# Altium PCB MR26_GSS.PcbDoc
Units mil, origin at the board's own origin, x right, y up, seen from the top; angles counter-clockwise.
Board outline 10600 x 7100 mil, 4 copper layers (Top, Route2, Route15, Bottom); 300 components, 152 nets, 1364 pads, 0 vias.
Unrouted connection lines stored in the file: 936.
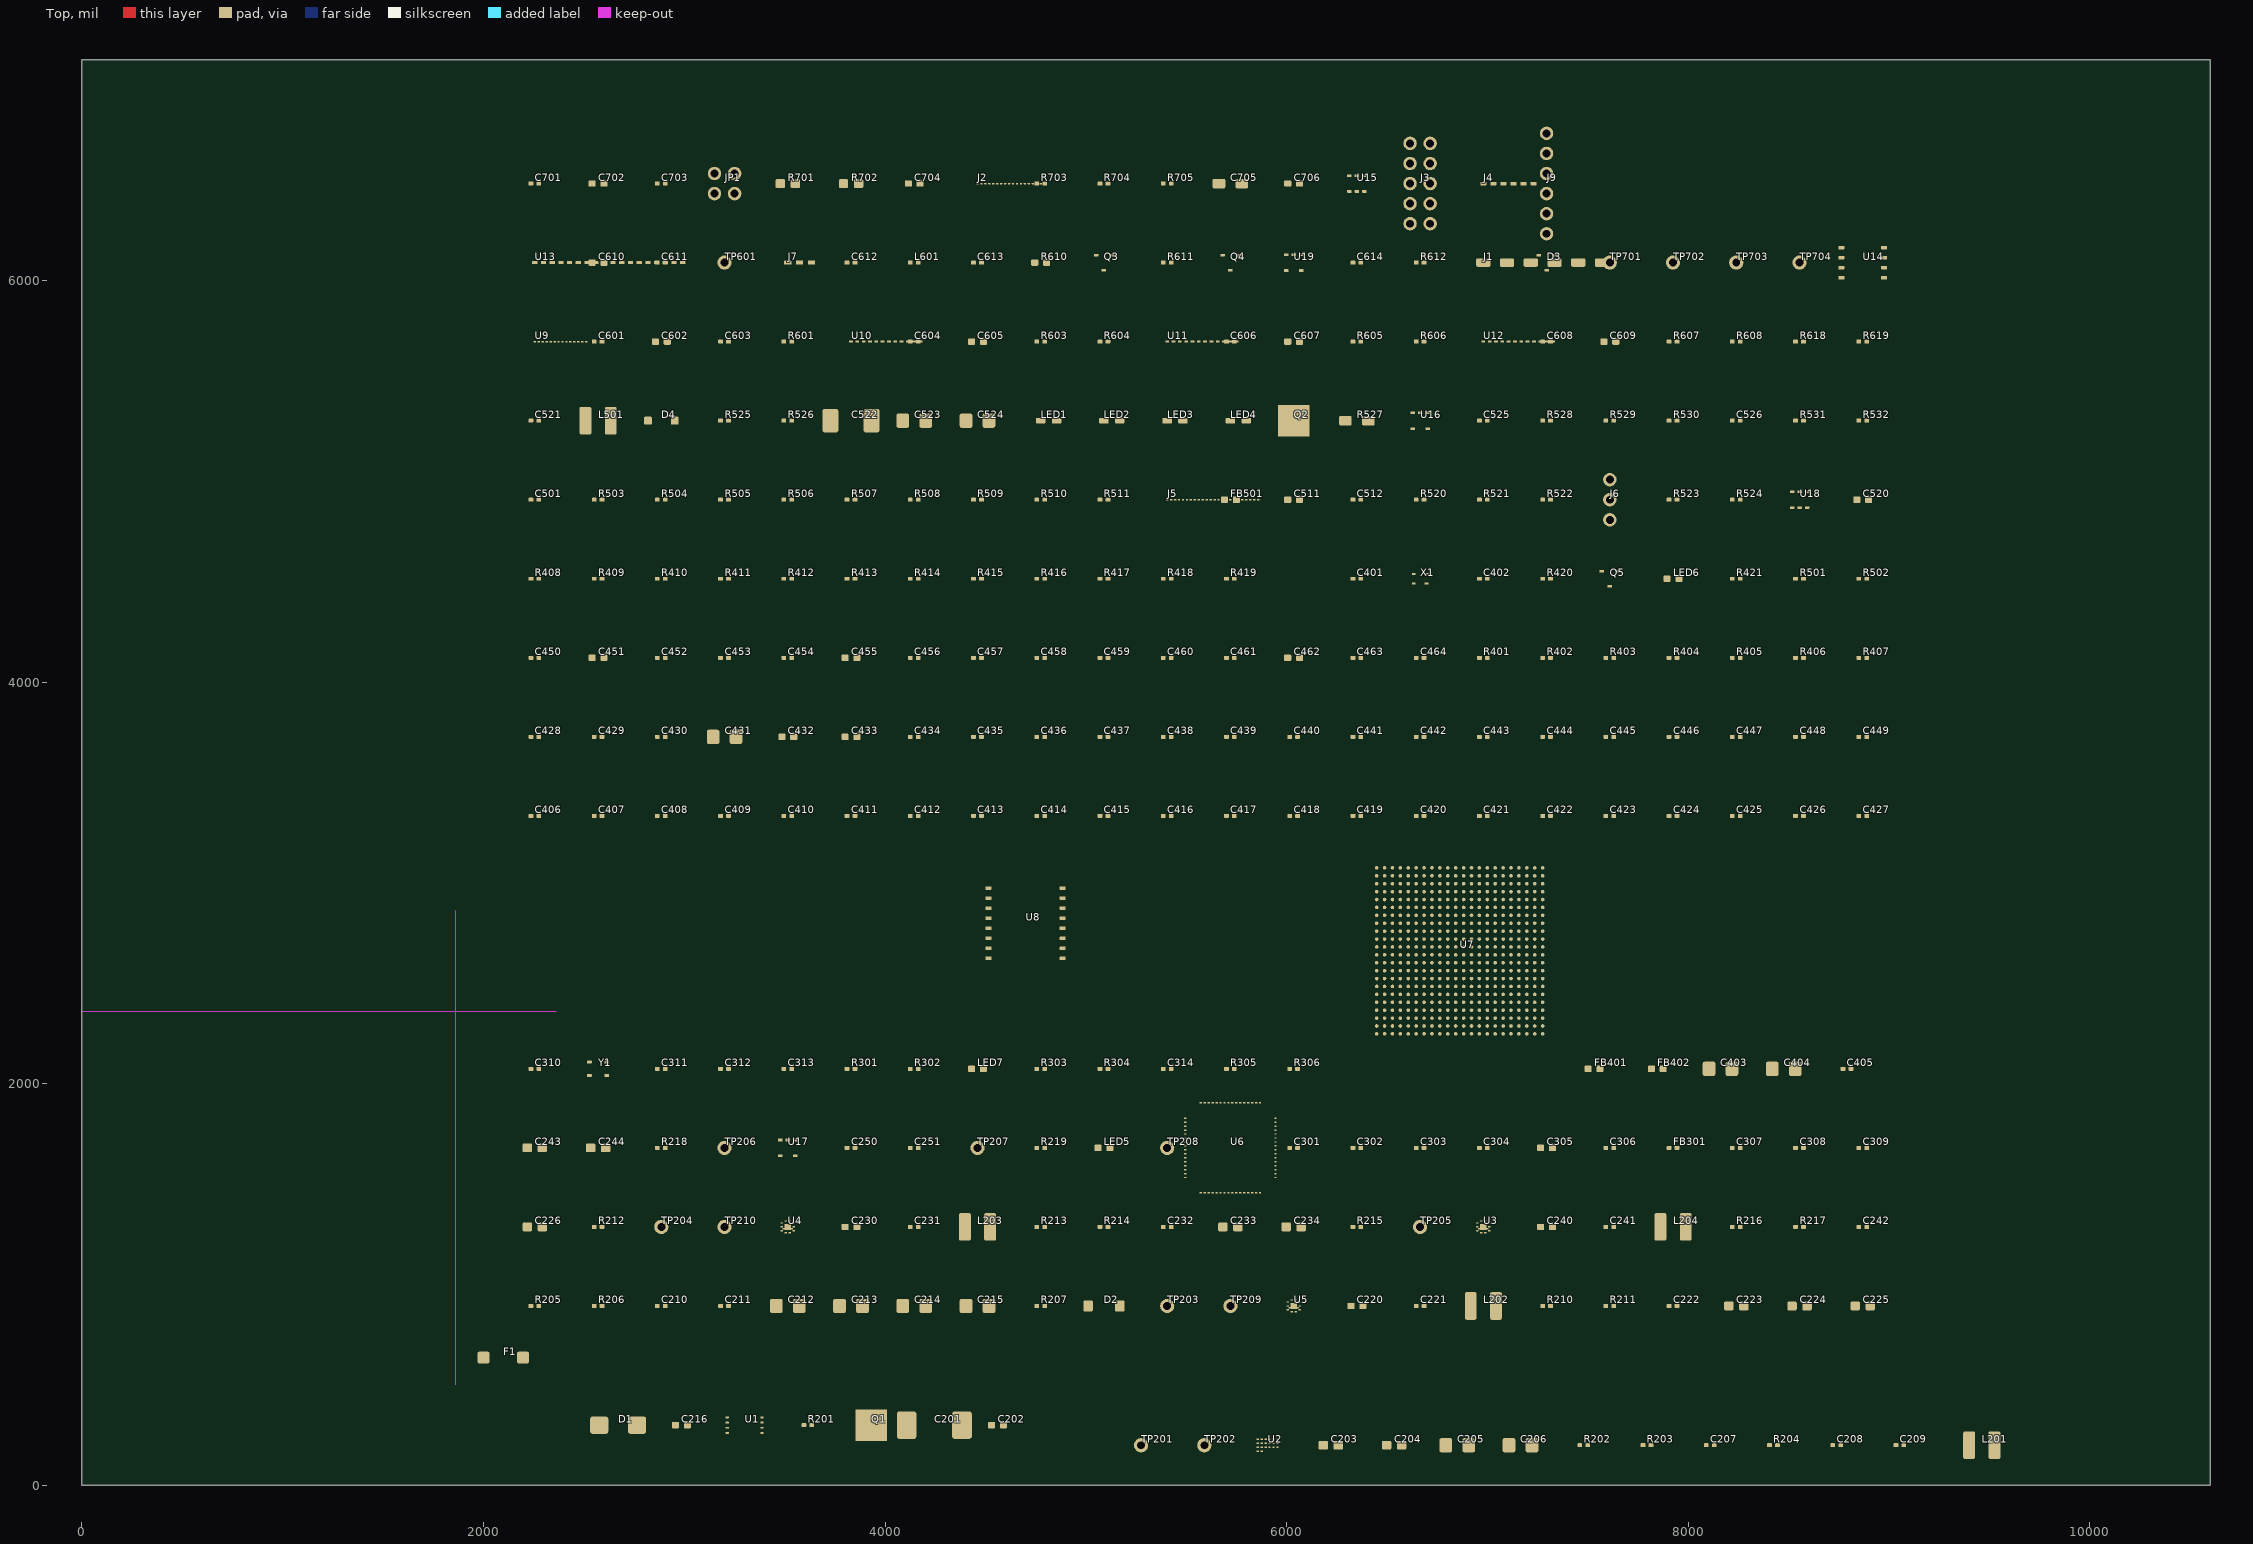
[diagram p0: Top view]
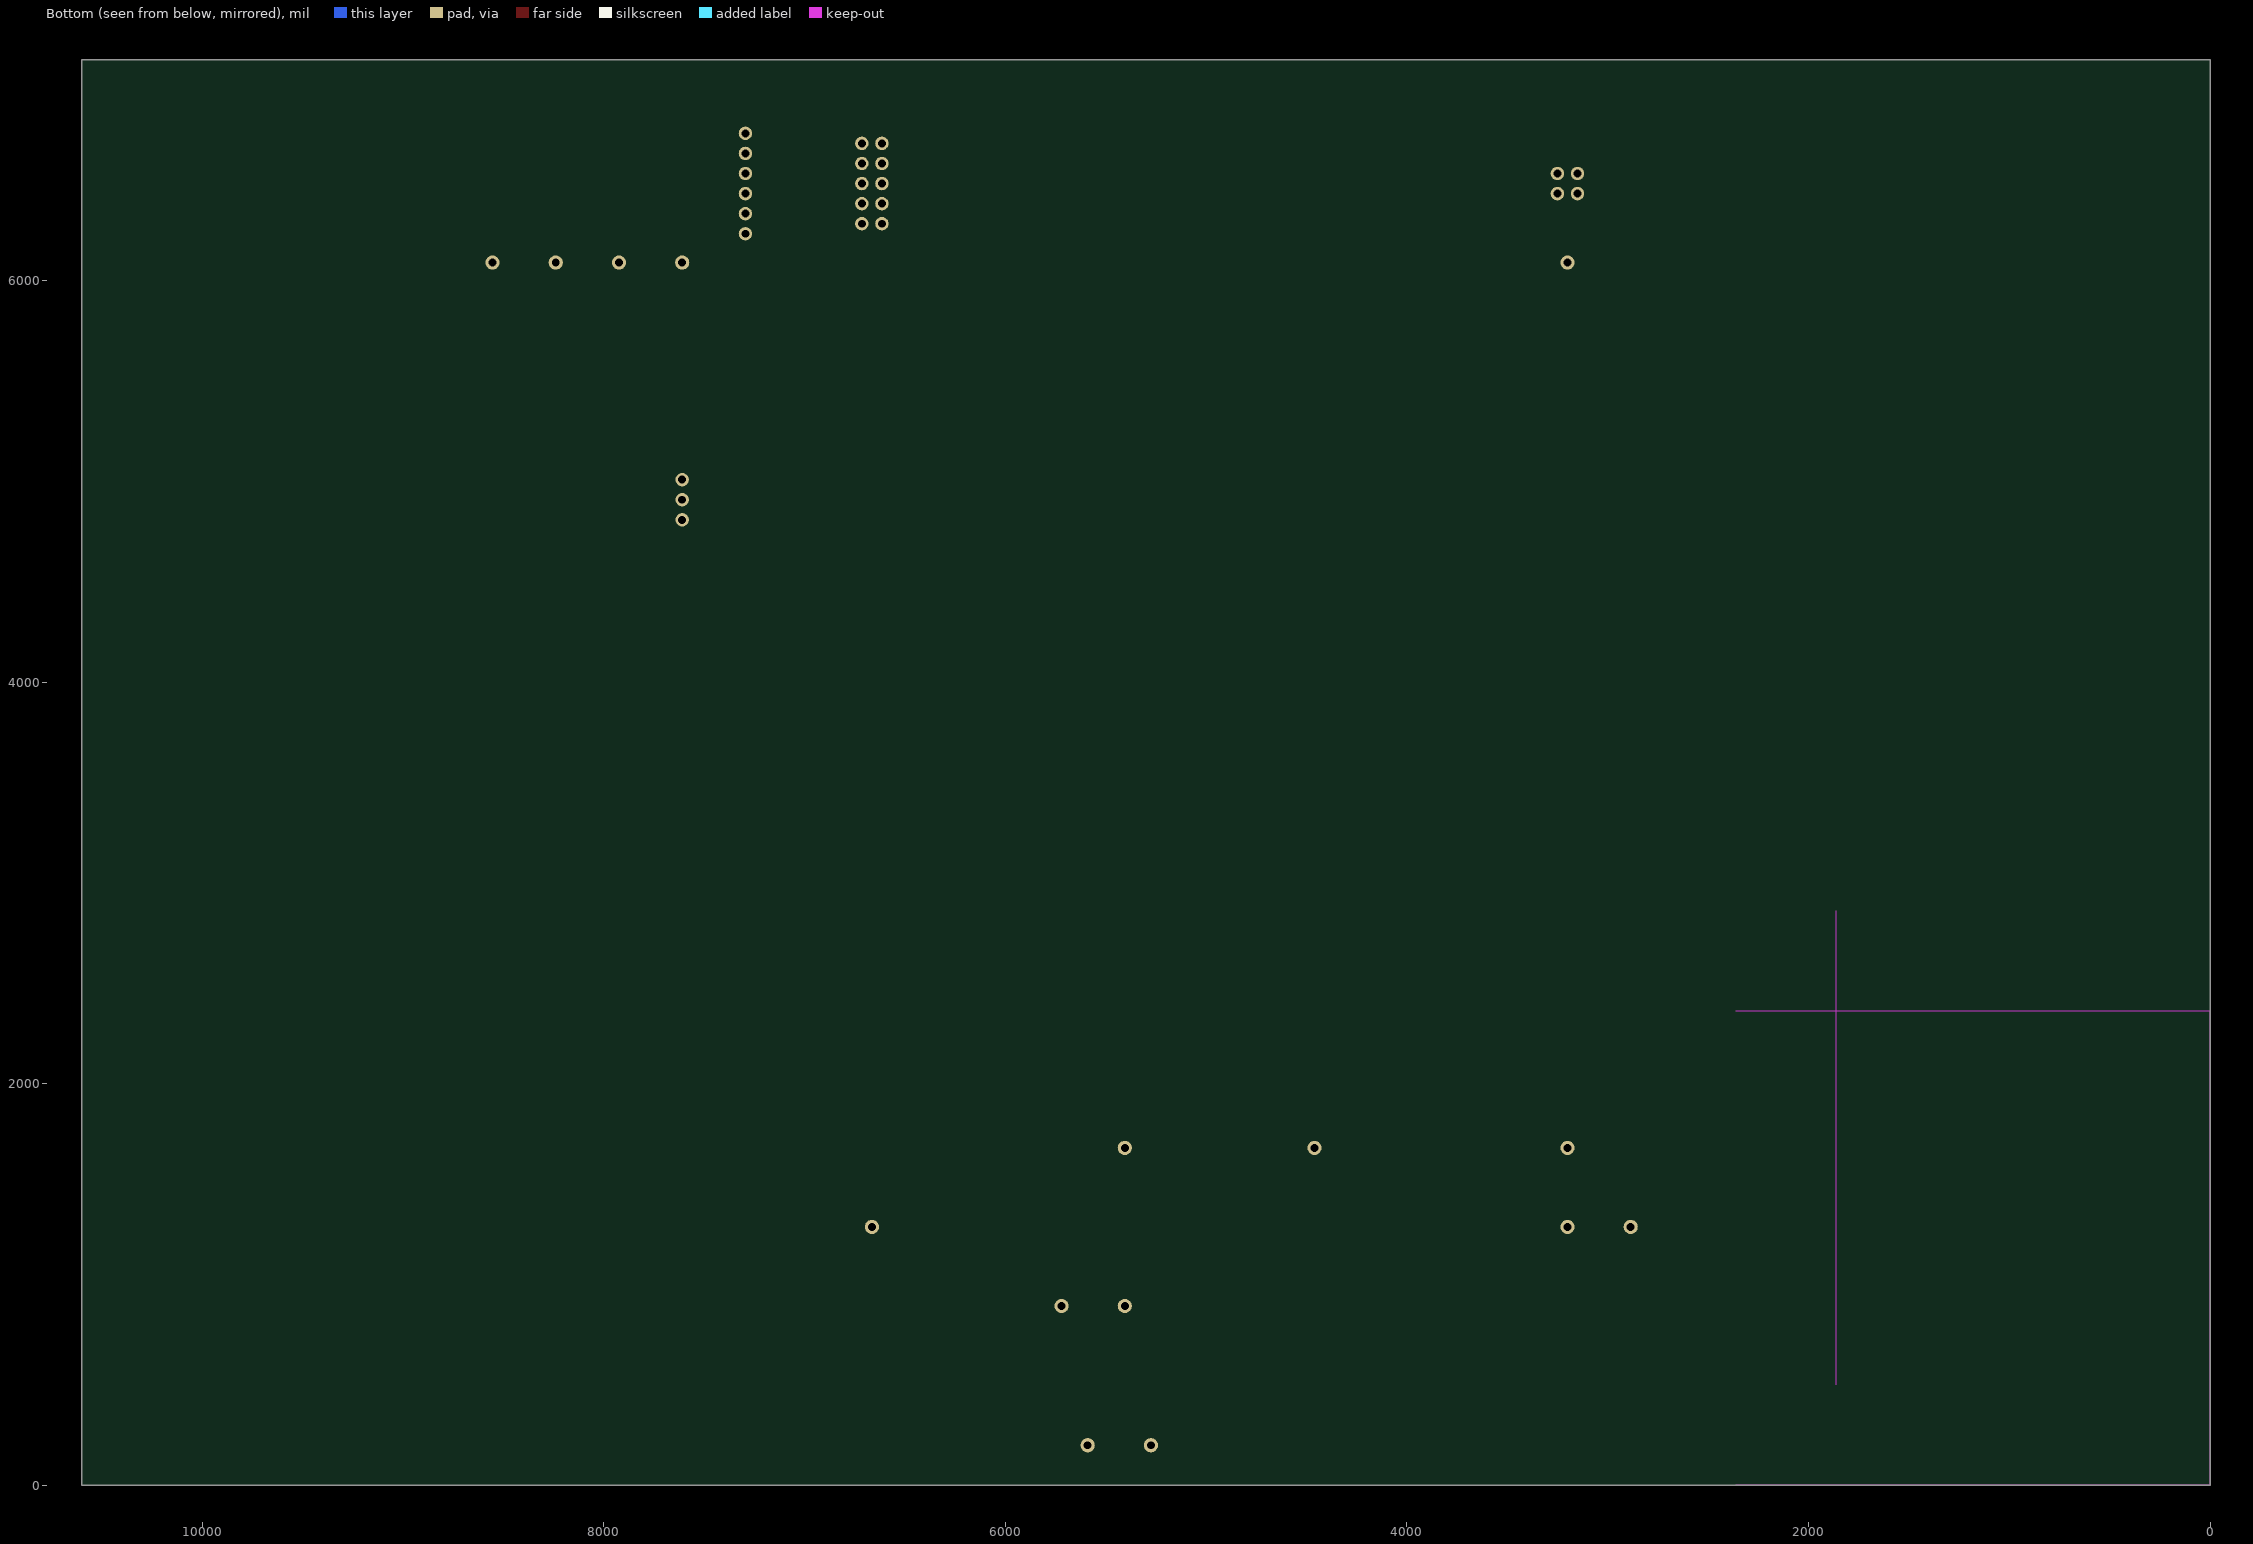
[diagram p1: Bottom view, seen from below]

## Layer stack, top to bottom
Top Solder: solder mask 0.4, Solder Resist, Dk 3.5
Top: signal copper 1.4
Dielectric 1: dielectric 12.6, FR-4, Dk 4.8
Route2: signal copper 1.4
Dielectric 2: dielectric 12.6, FR-4, Dk 4.8
Route15: signal copper 1.4
Dielectric 3: dielectric 12.6, FR-4, Dk 4.8
Bottom: signal copper 1.4
Bottom Solder: solder mask 0.4, Solder Resist, Dk 3.5

## Board outline
0,2362.2 0,0 10600,0 10600,7100 0,7100

## Design rules (kind name [scope] priority, off if disabled: settings)
Clearance "Clearance (Same Net)" [All] p1: gap=10 ignorepadtopadclearanceinfootprint=FALSE
Clearance [All] p2: gap=10 ignorepadtopadclearanceinfootprint=FALSE
MinimumSolderMaskSliver [All] p1 off: minsoldermaskwidth=10
PasteMaskExpansion mlMinCreamFrame [All] p1: expansion=0
PolygonConnect [All] p1: connectstyle=Relief reliefconductorwidth=10 reliefentries=4 polygonreliefangle="90 Angle" airgapwidth=10
RoutingVias [All] p1: holewidth=20 width=60 viastyle="Through Hole" minholewidth=20 minwidth=60 maxholewidth=100 maxwidth=100
SolderMaskExpansion mlMinStopFrame [All] p1: expansion=0 istentingtop=FALSE
Width [All] p1: maxlimit=10 minlimit=10 preferedwidth=10
28 further rules are at their usual default settings.

## Components (designator, comment, footprint, x,y, rotation, side; value= is the part's Value field where it differs from the comment)
C201 "" C_CP_Elec_8x10 4245.67,300 r0 top
C202 "" C_0603 4560.63,300 r0 top
C203 "" C_0805 6220.47,200 r0 top
C204 "" C_0805 6535.43,200 r0 top
C205 "" C_1210 6850.39,200 r0 top
C206 "" C_1210 7165.35,200 r0 top
C207 "" C_0402 8110.24,200 r0 top
C208 "" C_0402 8740.16,200 r0 top
C209 "" C_0402 9055.12,200 r0 top
C210 "" C_0402 2885.83,893.7 r0 top
C211 "" C_0402 3200.79,893.7 r0 top
C212 "" C_1210 3515.75,893.7 r0 top
C213 "" C_1210 3830.71,893.7 r0 top
C214 "" C_1210 4145.67,893.7 r0 top
C215 "" C_1210 4460.63,893.7 r0 top
C216 "" C_0603 2985.83,300 r0 top
C220 "" C_0603 6350.39,893.7 r0 top
C221 "" C_0402 6665.35,893.7 r0 top
C222 "" C_0402 7925.2,893.7 r0 top
C223 "" C_0805 8240.16,893.7 r0 top
C224 "" C_0805 8555.12,893.7 r0 top
C225 "" C_0805 8870.08,893.7 r0 top
C226 "" C_0805 2255.91,1287.4 r0 top
C230 "" C_0603 3830.71,1287.4 r0 top
C231 "" C_0402 4145.67,1287.4 r0 top
C232 "" C_0402 5405.51,1287.4 r0 top
C233 "" C_0805 5720.47,1287.4 r0 top
C234 "" C_0805 6035.43,1287.4 r0 top
C240 "" C_0603 7295.28,1287.4 r0 top
C241 "" C_0402 7610.24,1287.4 r0 top
C242 "" C_0402 8870.08,1287.4 r0 top
C243 "" C_0805 2255.91,1681.1 r0 top
C244 "" C_0805 2570.87,1681.1 r0 top
C250 "" C_0402 3830.71,1681.1 r0 top
C251 "" C_0402 4145.67,1681.1 r0 top
C301 "" C_0402 6035.43,1681.1 r0 top
C302 "" C_0402 6350.39,1681.1 r0 top
C303 "" C_0402 6665.35,1681.1 r0 top
C304 "" C_0402 6980.32,1681.1 r0 top
C305 "" C_0603 7295.28,1681.1 r0 top
C306 "" C_0402 7610.24,1681.1 r0 top
C307 "" C_0402 8240.16,1681.1 r0 top
C308 "" C_0402 8555.12,1681.1 r0 top
C309 "" C_0402 8870.08,1681.1 r0 top
C310 "" C_0402 2255.91,2074.8 r0 top
C311 "" C_0402 2885.83,2074.8 r0 top
C312 "" C_0402 3200.79,2074.8 r0 top
C313 "" C_0402 3515.75,2074.8 r0 top
C314 "" C_0402 5405.51,2074.8 r0 top
C401 "" C_0402 6350.39,4515.75 r0 top
C402 "" C_0402 6980.32,4515.75 r0 top
C403 "" C_1210 8161.42,2074.8 r0 top
C404 "" C_1210 8476.38,2074.8 r0 top
C405 "" C_0402 8791.34,2074.8 r0 top
C406 "" C_0402 2255.91,3334.65 r0 top
C407 "" C_0402 2570.87,3334.65 r0 top
C408 "" C_0402 2885.83,3334.65 r0 top
C409 "" C_0402 3200.79,3334.65 r0 top
C410 "" C_0402 3515.75,3334.65 r0 top
C411 "" C_0402 3830.71,3334.65 r0 top
C412 "" C_0402 4145.67,3334.65 r0 top
C413 "" C_0402 4460.63,3334.65 r0 top
C414 "" C_0402 4775.59,3334.65 r0 top
C415 "" C_0402 5090.55,3334.65 r0 top
C416 "" C_0402 5405.51,3334.65 r0 top
C417 "" C_0402 5720.47,3334.65 r0 top
C418 "" C_0402 6035.43,3334.65 r0 top
C419 "" C_0402 6350.39,3334.65 r0 top
C420 "" C_0402 6665.35,3334.65 r0 top
C421 "" C_0402 6980.32,3334.65 r0 top
C422 "" C_0402 7295.28,3334.65 r0 top
C423 "" C_0402 7610.24,3334.65 r0 top
C424 "" C_0402 7925.2,3334.65 r0 top
C425 "" C_0402 8240.16,3334.65 r0 top
C426 "" C_0402 8555.12,3334.65 r0 top
C427 "" C_0402 8870.08,3334.65 r0 top
C428 "" C_0402 2255.91,3728.35 r0 top
C429 "" C_0402 2570.87,3728.35 r0 top
C430 "" C_0402 2885.83,3728.35 r0 top
C431 "" C_1210 3200.79,3728.35 r0 top
C432 "" C_0603 3515.75,3728.35 r0 top
C433 "" C_0603 3830.71,3728.35 r0 top
C434 "" C_0402 4145.67,3728.35 r0 top
C435 "" C_0402 4460.63,3728.35 r0 top
C436 "" C_0402 4775.59,3728.35 r0 top
C437 "" C_0402 5090.55,3728.35 r0 top
C438 "" C_0402 5405.51,3728.35 r0 top
C439 "" C_0402 5720.47,3728.35 r0 top
C440 "" C_0402 6035.43,3728.35 r0 top
C441 "" C_0402 6350.39,3728.35 r0 top
C442 "" C_0402 6665.35,3728.35 r0 top
C443 "" C_0402 6980.32,3728.35 r0 top
C444 "" C_0402 7295.28,3728.35 r0 top
C445 "" C_0402 7610.24,3728.35 r0 top
C446 "" C_0402 7925.2,3728.35 r0 top
C447 "" C_0402 8240.16,3728.35 r0 top
C448 "" C_0402 8555.12,3728.35 r0 top
C449 "" C_0402 8870.08,3728.35 r0 top
C450 "" C_0402 2255.91,4122.05 r0 top
C451 "" C_0603 2570.87,4122.05 r0 top
C452 "" C_0402 2885.83,4122.05 r0 top
C453 "" C_0402 3200.79,4122.05 r0 top
C454 "" C_0402 3515.75,4122.05 r0 top
C455 "" C_0603 3830.71,4122.05 r0 top
C456 "" C_0402 4145.67,4122.05 r0 top
C457 "" C_0402 4460.63,4122.05 r0 top
C458 "" C_0402 4775.59,4122.05 r0 top
C459 "" C_0402 5090.55,4122.05 r0 top
C460 "" C_0402 5405.51,4122.05 r0 top
C461 "" C_0402 5720.47,4122.05 r0 top
C462 "" C_0603 6035.43,4122.05 r0 top
C463 "" C_0402 6350.39,4122.05 r0 top
C464 "" C_0402 6665.35,4122.05 r0 top
C501 "" C_0402 2255.91,4909.45 r0 top
C511 "" C_0603 6035.43,4909.45 r0 top
C512 "" C_0402 6350.39,4909.45 r0 top
C520 "" C_0603 8870.08,4909.45 r0 top
C521 "" C_0402 2255.91,5303.15 r0 top
C522 "" C_CP_Elec_6.3x7.7 3830.71,5303.15 r0 top
C523 "" C_1210 4145.67,5303.15 r0 top
C524 "" C_1210 4460.63,5303.15 r0 top
C525 "" C_0402 6980.32,5303.15 r0 top
C526 "" C_0402 8240.16,5303.15 r0 top
C601 "" C_0402 2570.87,5696.85 r0 top
C602 "" C_0603 2885.83,5696.85 r0 top
C603 "" C_0402 3200.79,5696.85 r0 top
C604 "" C_0402 4145.67,5696.85 r0 top
C605 "" C_0603 4460.63,5696.85 r0 top
C606 "" C_0402 5720.47,5696.85 r0 top
C607 "" C_0603 6035.43,5696.85 r0 top
C608 "" C_0402 7295.28,5696.85 r0 top
C609 "" C_0603 7610.24,5696.85 r0 top
C610 "" C_0603 2570.87,6090.55 r0 top
C611 "" C_0402 2885.83,6090.55 r0 top
C612 "" C_0402 3830.71,6090.55 r0 top
C613 "" C_0402 4460.63,6090.55 r0 top
C614 "" C_0402 6350.39,6090.55 r0 top
C701 "" C_0402 2255.91,6484.25 r0 top
C702 "" C_0603 2570.87,6484.25 r0 top
C703 "" C_0402 2885.83,6484.25 r0 top
C704 "" C_0603 4145.67,6484.25 r0 top
C705 "" C_1206 5720.47,6484.25 r0 top
C706 "" C_0603 6035.43,6484.25 r0 top
D1 "" D_SMB 2670.87,300 r0 top
D2 "" D_SOD-128 5090.55,893.7 r0 top
D3 "" SOT-23 7295.28,6090.55 r0 top
D4 "" D_SOD-123W 2885.83,5303.15 r0 top
F1 "" Fuse_Nano2_452 2098.43,636.57 r0 top
FB301 "" L_0402 7925.2,1681.1 r0 top
FB401 "" L_0603 7531.5,2074.8 r0 top
FB402 "" L_0603 7846.46,2074.8 r0 top
FB501 "" L_0603 5720.47,4909.45 r0 top
J1 "" Molex_Micro-Fit_43045-0600_2x3_RA 6980.32,6090.55 r0 top
J2 "" USB_C_GCT_USB4105 4460.63,6484.25 r0 top
J3 "" IDC-Header_2x05_P2.54mm 6665.35,6484.25 r0 top
J4 "" TC2030-IDC-NL 6980.32,6484.25 r0 top
J5 "" FH12-22S-0.5SH 5405.51,4909.45 r0 top
J6 "" PinHeader_1x03_P2.54mm 7610.24,4909.45 r0 top
J7 "" U.FL_Hirose 3515.75,6090.55 r0 top
J9 "" PinHeader_1x06_P2.54mm 7295.28,6484.25 r0 top
JP1 "" PinHeader_2x02_P2.54mm 3200.79,6484.25 r0 top
L201 "" L_XEL4030 9462.99,200 r0 top
L202 "" L_4x4 6980.32,893.7 r0 top
L203 "" L_4x4 4460.63,1287.4 r0 top
L204 "" L_4x4 7925.2,1287.4 r0 top
L501 "" L_XEL4030 2570.87,5303.15 r0 top
L601 "" L_0402 4145.67,6090.55 r0 top
LED1 "" OSLON_Black_3.75x3.75 4775.59,5303.15 r0 top
LED2 "" OSLON_Black_3.75x3.75 5090.55,5303.15 r0 top
LED3 "" OSLON_Black_3.75x3.75 5405.51,5303.15 r0 top
LED4 "" OSLON_Black_3.75x3.75 5720.47,5303.15 r0 top
LED5 "" LED_0603 5090.55,1681.1 r0 top
LED6 "" LED_0603 7925.2,4515.75 r0 top
LED7 "" LED_0603 4460.63,2074.8 r0 top
Q1 "" PG-TDSON-8 3930.71,300 r0 top
Q2 "" PG-TSDSON-8 6035.43,5303.15 r0 top
Q3 "" SOT-23 5090.55,6090.55 r0 top
Q4 "" SOT-23 5720.47,6090.55 r0 top
Q5 "" SOT-23 7610.24,4515.75 r0 top
R201 "" R_0402 3615.75,300 r0 top
R202 "" R_0402 7480.32,200 r0 top
R203 "" R_0402 7795.28,200 r0 top
R204 "" R_0402 8425.2,200 r0 top
R205 "" R_0402 2255.91,893.7 r0 top
R206 "" R_0402 2570.87,893.7 r0 top
R207 "" R_0402 4775.59,893.7 r0 top
R210 "" R_0402 7295.28,893.7 r0 top
R211 "" R_0402 7610.24,893.7 r0 top
R212 "" R_0402 2570.87,1287.4 r0 top
R213 "" R_0402 4775.59,1287.4 r0 top
R214 "" R_0402 5090.55,1287.4 r0 top
R215 "" R_0402 6350.39,1287.4 r0 top
R216 "" R_0402 8240.16,1287.4 r0 top
R217 "" R_0402 8555.12,1287.4 r0 top
R218 "" R_0402 2885.83,1681.1 r0 top
R219 "" R_0402 4775.59,1681.1 r0 top
R301 "" R_0402 3830.71,2074.8 r0 top
R302 "" R_0402 4145.67,2074.8 r0 top
R303 "" R_0402 4775.59,2074.8 r0 top
R304 "" R_0402 5090.55,2074.8 r0 top
R305 "" R_0402 5720.47,2074.8 r0 top
R306 "" R_0402 6035.43,2074.8 r0 top
R401 "" R_0402 6980.32,4122.05 r0 top
R402 "" R_0402 7295.28,4122.05 r0 top
R403 "" R_0402 7610.24,4122.05 r0 top
R404 "" R_0402 7925.2,4122.05 r0 top
R405 "" R_0402 8240.16,4122.05 r0 top
R406 "" R_0402 8555.12,4122.05 r0 top
R407 "" R_0402 8870.08,4122.05 r0 top
R408 "" R_0402 2255.91,4515.75 r0 top
R409 "" R_0402 2570.87,4515.75 r0 top
R410 "" R_0402 2885.83,4515.75 r0 top
R411 "" R_0402 3200.79,4515.75 r0 top
R412 "" R_0402 3515.75,4515.75 r0 top
R413 "" R_0402 3830.71,4515.75 r0 top
R414 "" R_0402 4145.67,4515.75 r0 top
R415 "" R_0402 4460.63,4515.75 r0 top
R416 "" R_0402 4775.59,4515.75 r0 top
R417 "" R_0402 5090.55,4515.75 r0 top
R418 "" R_0402 5405.51,4515.75 r0 top
R419 "" R_0402 5720.47,4515.75 r0 top
R420 "" R_0402 7295.28,4515.75 r0 top
R421 "" R_0402 8240.16,4515.75 r0 top
R501 "" R_0402 8555.12,4515.75 r0 top
R502 "" R_0402 8870.08,4515.75 r0 top
R503 "" R_0402 2570.87,4909.45 r0 top
R504 "" R_0402 2885.83,4909.45 r0 top
R505 "" R_0402 3200.79,4909.45 r0 top
R506 "" R_0402 3515.75,4909.45 r0 top
R507 "" R_0402 3830.71,4909.45 r0 top
R508 "" R_0402 4145.67,4909.45 r0 top
R509 "" R_0402 4460.63,4909.45 r0 top
R510 "" R_0402 4775.59,4909.45 r0 top
R511 "" R_0402 5090.55,4909.45 r0 top
R520 "" R_0402 6665.35,4909.45 r0 top
R521 "" R_0402 6980.32,4909.45 r0 top
R522 "" R_0402 7295.28,4909.45 r0 top
R523 "" R_0402 7925.2,4909.45 r0 top
R524 "" R_0402 8240.16,4909.45 r0 top
R525 "" R_0402 3200.79,5303.15 r0 top
R526 "" R_0402 3515.75,5303.15 r0 top
R527 "" R_1206 6350.39,5303.15 r0 top
R528 "" R_0402 7295.28,5303.15 r0 top
R529 "" R_0402 7610.24,5303.15 r0 top
R530 "" R_0402 7925.2,5303.15 r0 top
R531 "" R_0402 8555.12,5303.15 r0 top
R532 "" R_0402 8870.08,5303.15 r0 top
R601 "" R_0402 3515.75,5696.85 r0 top
R603 "" R_0402 4775.59,5696.85 r0 top
R604 "" R_0402 5090.55,5696.85 r0 top
R605 "" R_0402 6350.39,5696.85 r0 top
R606 "" R_0402 6665.35,5696.85 r0 top
R607 "" R_0402 7925.2,5696.85 r0 top
R608 "" R_0402 8240.16,5696.85 r0 top
R610 "" R_0603 4775.59,6090.55 r0 top
R611 "" R_0402 5405.51,6090.55 r0 top
R612 "" R_0402 6665.35,6090.55 r0 top
R618 "" R_0402 8555.12,5696.85 r0 top
R619 "" R_0402 8870.08,5696.85 r0 top
R701 "" R_0805 3515.75,6484.25 r0 top
R702 "" R_0805 3830.71,6484.25 r0 top
R703 "" R_0402 4775.59,6484.25 r0 top
R704 "" R_0402 5090.55,6484.25 r0 top
R705 "" R_0402 5405.51,6484.25 r0 top
TP201 "" TP_1.0mm 5275.59,200 r0 top
TP202 "" TP_1.0mm 5590.55,200 r0 top
TP203 "" TP_1.0mm 5405.51,893.7 r0 top
TP204 "" TP_1.0mm 2885.83,1287.4 r0 top
TP205 "" TP_1.0mm 6665.35,1287.4 r0 top
TP206 "" TP_1.0mm 3200.79,1681.1 r0 top
TP207 "" TP_1.0mm 4460.63,1681.1 r0 top
TP208 "" TP_1.0mm 5405.51,1681.1 r0 top
TP209 "" TP_1.0mm 5720.47,893.7 r0 top
TP210 "" TP_1.0mm 3200.79,1287.4 r0 top
TP601 "" TP_1.0mm 3200.79,6090.55 r0 top
TP701 "" TP_1.0mm 7610.24,6090.55 r0 top
TP702 "" TP_1.0mm 7925.2,6090.55 r0 top
TP703 "" TP_1.0mm 8240.16,6090.55 r0 top
TP704 "" TP_1.0mm 8555.12,6090.55 r0 top
U1 "" MSOP-8 3300.79,300 r0 top
U2 "" QFN-18_3x4_UDC 5905.51,200 r0 top
U3 "" LQFN-12_2x2 6980.32,1287.4 r0 top
U4 "" LQFN-12_2x2 3515.75,1287.4 r0 top
U5 "" LQFN-12_2x2 6035.43,893.7 r0 top
U6 "" LQFP-64_10x10 5720.47,1681.1 r0 top
U7 "" FBGA-484_23x23_1.0mm 6862.2,2662.2 r0 top
U8 "" SOIC-16W_7.5x10.3 4700,2800 r0 top
U9 "" LGA-14L_2.5x3 2255.91,5696.85 r0 top
U10 "" VL53L4CD_LGA12 3830.71,5696.85 r0 top
U11 "" VL53L4CD_LGA12 5405.51,5696.85 r0 top
U12 "" VL53L4CD_LGA12 6980.32,5696.85 r0 top
U13 "" u-blox_LCC-18_9.7x10.1 2255.91,6090.55 r0 top
U14 "" SOIC-8 8870.08,6090.55 r0 top
U15 "" SOT-23-6 6350.39,6484.25 r0 top
U16 "" TSOT-23-5 6665.35,5303.15 r0 top
U17 "" TSOT-23-5 3515.75,1681.1 r0 top
U18 "" TSOT-23-6 8555.12,4909.45 r0 top
U19 "" SOT-23-5 6035.43,6090.55 r0 top
X1 "" OSC_2.5x2.0 6665.35,4515.75 r0 top
Y1 "" Crystal_3225_4pad 2570.87,2074.8 r0 top

## Footprints (in the part's own frame and the unit in brackets; to place one, negate y for a bottom-side part, rotate by r counter-clockwise, add the part's x,y. Pads: shape width x height; smd on the part's side, far side on the other; paste and mask are expansions set on the pad)
C_0402 [mil] "C_0402"
  rrect30% 23.62x19.69 smd: 1(-19.69,0) 2(19.69,0)
  body extent -40,-40 40,40, height 150
C_0603 [mil] "C_0603"
  rrect30% 35.43x31.5 smd: 1(-29.53,0) 2(29.53,0)
  body extent -56,-56 56,56, height 150
C_0805 [mil] "C_0805"
  rrect30% 47.24x43.31 smd: 1(-37.4,0) 2(37.4,0)
  body extent -70,-70 70,70, height 150
C_1206 [mil] "C_1206"
  rrect30% 62.99x47.24 smd: 1(-57.09,0) 2(57.09,0)
  body extent -97,-97 97,97, height 150
C_1210 [mil] "C_1210"
  rrect30% 62.99x70.87 smd: 1(-57.09,0) 2(57.09,0)
  body extent -97,-97 97,97, height 150
C_CP_Elec_6.3x7.7 [mm] "C_CP_Elec_6.3x7.7"
  rrect30% 2x3 smd: 1(-2.6,0) 2(2.6,0)
  body extent -3.82,-3.82 3.82,3.82, height 3.81
C_CP_Elec_8x10 [mil] "C_CP_Elec_8x10"
  rrect30% 98.43x137.8 smd: 1(-137.8,0) 2(137.8,0)
  body extent -196,-196 196,196, height 150
Crystal_3225_4pad [mm] "Crystal_3225_4pad"
  rrect30% 0.6x0.35 smd: 1(-1.1,0.85) 2(1.1,0.85) 3(1.1,-0.85) 4(-1.1,-0.85)
  body extent -1.87,-1.52 1.87,1.52, height 3.81
D_SMB [mil] "D_SMB"
  rrect30% 90.55x86.61 smd: 1(-94.49,0) 2(94.49,0)
  body extent -148,-148 148,148, height 150
D_SOD-123W [mm] "D_SOD-123W"
  rrect30% 1x1 smd: 1(-1.7,0) 2(1.7,0)
  body extent -2.42,-2.42 2.42,2.42, height 3.81
D_SOD-128 [mm] "D_SOD-128"
  rrect30% 1.2x1.4 smd: 1(-2,0) 2(2,0)
  body extent -2.82,-2.82 2.82,2.82, height 3.81
FBGA-484_23x23_1.0mm [mil] "FBGA-484_23x23_1.0mm"
  rrect100% 17.72x17.72 smd: A1(-413.39,-413.39) A2(-374.02,-413.39) A3(-334.65,-413.39) A4(-295.28,-413.39) A5(-255.91,-413.39) A6(-216.54,-413.39) A7(-177.17,-413.39) A8(-137.8,-413.39) A9(-98.43,-413.39) A10(-59.06,-413.39) A11(-19.69,-413.39) A12(19.69,-413.39) A13(59.06,-413.39) A14(98.43,-413.39) A15(137.8,-413.39) A16(177.17,-413.39) A17(216.54,-413.39) A18(255.91,-413.39) A19(295.28,-413.39) A20(334.65,-413.39) A21(374.02,-413.39) A22(413.39,-413.39) AA1(-413.39,374.02) AA2(-374.02,374.02) AA3(-334.65,374.02) AA4(-295.28,374.02) AA5(-255.91,374.02) AA6(-216.54,374.02) AA7(-177.17,374.02) AA8(-137.8,374.02) AA9(-98.43,374.02) AA10(-59.06,374.02) AA11(-19.69,374.02) AA12(19.69,374.02) AA13(59.06,374.02) AA14(98.43,374.02) AA15(137.8,374.02) AA16(177.17,374.02) AA17(216.54,374.02) AA18(255.91,374.02) AA19(295.28,374.02) AA20(334.65,374.02) AA21(374.02,374.02) AA22(413.39,374.02) AB1(-413.39,413.39) AB2(-374.02,413.39) AB3(-334.65,413.39) AB4(-295.28,413.39) AB5(-255.91,413.39) AB6(-216.54,413.39) AB7(-177.17,413.39) AB8(-137.8,413.39) AB9(-98.43,413.39) AB10(-59.06,413.39) AB11(-19.69,413.39) AB12(19.69,413.39) AB13(59.06,413.39) AB14(98.43,413.39) AB15(137.8,413.39) AB16(177.17,413.39) AB17(216.54,413.39) AB18(255.91,413.39) AB19(295.28,413.39) AB20(334.65,413.39) AB21(374.02,413.39) AB22(413.39,413.39) B1(-413.39,-374.02) B2(-374.02,-374.02) B3(-334.65,-374.02) B4(-295.28,-374.02) B5(-255.91,-374.02) B6(-216.54,-374.02) B7(-177.17,-374.02) B8(-137.8,-374.02) B9(-98.43,-374.02) B10(-59.06,-374.02) B11(-19.69,-374.02) B12(19.69,-374.02) B13(59.06,-374.02) B14(98.43,-374.02) B15(137.8,-374.02) B16(177.17,-374.02) B17(216.54,-374.02) B18(255.91,-374.02) B19(295.28,-374.02) B20(334.65,-374.02) B21(374.02,-374.02) B22(413.39,-374.02) C1(-413.39,-334.65) C2(-374.02,-334.65) C3(-334.65,-334.65) C4(-295.28,-334.65) C5(-255.91,-334.65) C6(-216.54,-334.65) C7(-177.17,-334.65) C8(-137.8,-334.65) C9(-98.43,-334.65) C10(-59.06,-334.65) C11(-19.69,-334.65) C12(19.69,-334.65) C13(59.06,-334.65) C14(98.43,-334.65) C15(137.8,-334.65) C16(177.17,-334.65) C17(216.54,-334.65) C18(255.91,-334.65) C19(295.28,-334.65) C20(334.65,-334.65) C21(374.02,-334.65) C22(413.39,-334.65) D1(-413.39,-295.28) D2(-374.02,-295.28) D3(-334.65,-295.28) D4(-295.28,-295.28) D5(-255.91,-295.28) D6(-216.54,-295.28) D7(-177.17,-295.28) D8(-137.8,-295.28) D9(-98.43,-295.28) D10(-59.06,-295.28) D11(-19.69,-295.28) D12(19.69,-295.28) D13(59.06,-295.28) D14(98.43,-295.28) D15(137.8,-295.28) D16(177.17,-295.28) D17(216.54,-295.28) D18(255.91,-295.28) D19(295.28,-295.28) D20(334.65,-295.28) D21(374.02,-295.28) D22(413.39,-295.28) E1(-413.39,-255.91) E2(-374.02,-255.91) E3(-334.65,-255.91) E4(-295.28,-255.91) E5(-255.91,-255.91) E6(-216.54,-255.91) E7(-177.17,-255.91) E8(-137.8,-255.91) E9(-98.43,-255.91) E10(-59.06,-255.91) E11(-19.69,-255.91) E12(19.69,-255.91) E13(59.06,-255.91) E14(98.43,-255.91) E15(137.8,-255.91) E16(177.17,-255.91) E17(216.54,-255.91) E18(255.91,-255.91) E19(295.28,-255.91) E20(334.65,-255.91) E21(374.02,-255.91) E22(413.39,-255.91) F1(-413.39,-216.54) F2(-374.02,-216.54) F3(-334.65,-216.54) F4(-295.28,-216.54) F5(-255.91,-216.54) F6(-216.54,-216.54) F7(-177.17,-216.54) F8(-137.8,-216.54) F9(-98.43,-216.54) F10(-59.06,-216.54) F11(-19.69,-216.54) F12(19.69,-216.54) F13(59.06,-216.54) F14(98.43,-216.54) F15(137.8,-216.54) F16(177.17,-216.54) F17(216.54,-216.54) F18(255.91,-216.54) F19(295.28,-216.54) F20(334.65,-216.54) F21(374.02,-216.54) F22(413.39,-216.54) G1(-413.39,-177.17) G2(-374.02,-177.17) G3(-334.65,-177.17) G4(-295.28,-177.17) G5(-255.91,-177.17) G6(-216.54,-177.17) G7(-177.17,-177.17) G8(-137.8,-177.17) G9(-98.43,-177.17) G10(-59.06,-177.17) G11(-19.69,-177.17) G12(19.69,-177.17) G13(59.06,-177.17) G14(98.43,-177.17) G15(137.8,-177.17) G16(177.17,-177.17) G17(216.54,-177.17) G18(255.91,-177.17) G19(295.28,-177.17) G20(334.65,-177.17) G21(374.02,-177.17) G22(413.39,-177.17) H1(-413.39,-137.8) H2(-374.02,-137.8) H3(-334.65,-137.8) H4(-295.28,-137.8) H5(-255.91,-137.8) H6(-216.54,-137.8) H7(-177.17,-137.8) H8(-137.8,-137.8) H9(-98.43,-137.8) H10(-59.06,-137.8) H11(-19.69,-137.8) H12(19.69,-137.8) H13(59.06,-137.8) H14(98.43,-137.8) H15(137.8,-137.8) H16(177.17,-137.8) H17(216.54,-137.8) H18(255.91,-137.8) H19(295.28,-137.8) H20(334.65,-137.8) H21(374.02,-137.8) H22(413.39,-137.8) J1(-413.39,-98.43) J2(-374.02,-98.43) J3(-334.65,-98.43) J4(-295.28,-98.43) J5(-255.91,-98.43) J6(-216.54,-98.43) J7(-177.17,-98.43) J8(-137.8,-98.43) J9(-98.43,-98.43) J10(-59.06,-98.43) J11(-19.69,-98.43) J12(19.69,-98.43) J13(59.06,-98.43) J14(98.43,-98.43) J15(137.8,-98.43) J16(177.17,-98.43) J17(216.54,-98.43) J18(255.91,-98.43) J19(295.28,-98.43) J20(334.65,-98.43) J21(374.02,-98.43) J22(413.39,-98.43) K1(-413.39,-59.06) K2(-374.02,-59.06) K3(-334.65,-59.06) K4(-295.28,-59.06) K5(-255.91,-59.06) K6(-216.54,-59.06) K7(-177.17,-59.06) K8(-137.8,-59.06) K9(-98.43,-59.06) K10(-59.06,-59.06) K11(-19.69,-59.06) K12(19.69,-59.06) K13(59.06,-59.06) K14(98.43,-59.06) K15(137.8,-59.06) K16(177.17,-59.06) K17(216.54,-59.06) K18(255.91,-59.06) K19(295.28,-59.06) K20(334.65,-59.06) K21(374.02,-59.06) K22(413.39,-59.06) L1(-413.39,-19.69) L2(-374.02,-19.69) L3(-334.65,-19.69) L4(-295.28,-19.69) L5(-255.91,-19.69) L6(-216.54,-19.69) L7(-177.17,-19.69) L8(-137.8,-19.69) L9(-98.43,-19.69) L10(-59.06,-19.69) L11(-19.69,-19.69) L12(19.69,-19.69) L13(59.06,-19.69) L14(98.43,-19.69) L15(137.8,-19.69) L16(177.17,-19.69) L17(216.54,-19.69) L18(255.91,-19.69) L19(295.28,-19.69) L20(334.65,-19.69) L21(374.02,-19.69) L22(413.39,-19.69) M1(-413.39,19.69) M2(-374.02,19.69) M3(-334.65,19.69) M4(-295.28,19.69) M5(-255.91,19.69) M6(-216.54,19.69) M7(-177.17,19.69) M8(-137.8,19.69) M9(-98.43,19.69) M10(-59.06,19.69) M11(-19.69,19.69) M12(19.69,19.69) M13(59.06,19.69) M14(98.43,19.69) M15(137.8,19.69) M16(177.17,19.69) M17(216.54,19.69) M18(255.91,19.69) M19(295.28,19.69) M20(334.65,19.69) M21(374.02,19.69) M22(413.39,19.69) N1(-413.39,59.06) N2(-374.02,59.06) N3(-334.65,59.06) N4(-295.28,59.06) N5(-255.91,59.06) N6(-216.54,59.06) N7(-177.17,59.06) N8(-137.8,59.06) N9(-98.43,59.06) N10(-59.06,59.06) N11(-19.69,59.06) N12(19.69,59.06) N13(59.06,59.06) N14(98.43,59.06) N15(137.8,59.06) N16(177.17,59.06) N17(216.54,59.06) N18(255.91,59.06) N19(295.28,59.06) N20(334.65,59.06) N21(374.02,59.06) N22(413.39,59.06) P1(-413.39,98.43) P2(-374.02,98.43) P3(-334.65,98.43) P4(-295.28,98.43) P5(-255.91,98.43) P6(-216.54,98.43) P7(-177.17,98.43) P8(-137.8,98.43) P9(-98.43,98.43) P10(-59.06,98.43) P11(-19.69,98.43) P12(19.69,98.43) P13(59.06,98.43) P14(98.43,98.43) P15(137.8,98.43) P16(177.17,98.43) P17(216.54,98.43) P18(255.91,98.43) P19(295.28,98.43) P20(334.65,98.43) P21(374.02,98.43) P22(413.39,98.43) R1(-413.39,137.8) R2(-374.02,137.8) R3(-334.65,137.8) R4(-295.28,137.8) R5(-255.91,137.8) R6(-216.54,137.8) R7(-177.17,137.8) R8(-137.8,137.8) R9(-98.43,137.8) R10(-59.06,137.8) R11(-19.69,137.8) R12(19.69,137.8) R13(59.06,137.8) R14(98.43,137.8) R15(137.8,137.8) R16(177.17,137.8) R17(216.54,137.8) R18(255.91,137.8) R19(295.28,137.8) R20(334.65,137.8) R21(374.02,137.8) R22(413.39,137.8) T1(-413.39,177.17) T2(-374.02,177.17) T3(-334.65,177.17) T4(-295.28,177.17) T5(-255.91,177.17) T6(-216.54,177.17) T7(-177.17,177.17) T8(-137.8,177.17) T9(-98.43,177.17) T10(-59.06,177.17) T11(-19.69,177.17) T12(19.69,177.17) T13(59.06,177.17) T14(98.43,177.17) T15(137.8,177.17) T16(177.17,177.17) T17(216.54,177.17) T18(255.91,177.17) T19(295.28,177.17) T20(334.65,177.17) T21(374.02,177.17) T22(413.39,177.17) U1(-413.39,216.54) U2(-374.02,216.54) U3(-334.65,216.54) U4(-295.28,216.54) U5(-255.91,216.54) U6(-216.54,216.54) U7(-177.17,216.54) U8(-137.8,216.54) U9(-98.43,216.54) U10(-59.06,216.54) U11(-19.69,216.54) U12(19.69,216.54) U13(59.06,216.54) U14(98.43,216.54) U15(137.8,216.54) U16(177.17,216.54) U17(216.54,216.54) U18(255.91,216.54) U19(295.28,216.54) U20(334.65,216.54) U21(374.02,216.54) U22(413.39,216.54) V1(-413.39,255.91) V2(-374.02,255.91) V3(-334.65,255.91) V4(-295.28,255.91) V5(-255.91,255.91) V6(-216.54,255.91) V7(-177.17,255.91) V8(-137.8,255.91) V9(-98.43,255.91) V10(-59.06,255.91) V11(-19.69,255.91) V12(19.69,255.91) V13(59.06,255.91) V14(98.43,255.91) V15(137.8,255.91) V16(177.17,255.91) V17(216.54,255.91) V18(255.91,255.91) V19(295.28,255.91) V20(334.65,255.91) V21(374.02,255.91) V22(413.39,255.91) W1(-413.39,295.28) W2(-374.02,295.28) W3(-334.65,295.28) W4(-295.28,295.28) W5(-255.91,295.28) W6(-216.54,295.28) W7(-177.17,295.28) W8(-137.8,295.28) W9(-98.43,295.28) W10(-59.06,295.28) W11(-19.69,295.28) W12(19.69,295.28) W13(59.06,295.28) W14(98.43,295.28) W15(137.8,295.28) W16(177.17,295.28) W17(216.54,295.28) W18(255.91,295.28) W19(295.28,295.28) W20(334.65,295.28) W21(374.02,295.28) W22(413.39,295.28) Y1(-413.39,334.65) Y2(-374.02,334.65) Y3(-334.65,334.65) Y4(-295.28,334.65) Y5(-255.91,334.65) Y6(-216.54,334.65) Y7(-177.17,334.65) Y8(-137.8,334.65) Y9(-98.43,334.65) Y10(-59.06,334.65) Y11(-19.69,334.65) Y12(19.69,334.65) Y13(59.06,334.65) Y14(98.43,334.65) Y15(137.8,334.65) Y16(177.17,334.65) Y17(216.54,334.65) Y18(255.91,334.65) Y19(295.28,334.65) Y20(334.65,334.65) Y21(374.02,334.65) Y22(413.39,334.65)
  body extent -475,-475 475,475, height 150
FH12-22S-0.5SH [mm] "FH12-22S-0.5SH"
  rrect30% 0.3x0.175 smd: 1(0,0) 2(0.5,0) 3(1,0) 4(1.5,0) 5(2,0) 6(2.5,0) 7(3,0) 8(3.5,0) 9(4,0) 10(4.5,0) 11(5,0) 12(6,0) 13(6.5,0) 14(7,0) 15(7.5,0) 16(8,0) 17(8.5,0) 18(9,0) 19(9.5,0) 20(10,0) 21(10.5,0) 22(11,0) MP1(5.5,0) MP2(11.5,0)
  body extent -6.77,-1.27 11.65,1.27, height 3.81
Fuse_Nano2_452 [mil] "Fuse_Nano2_452"
  rrect30% 59.06x59.06 smd: 1(-98.43,0) 2(98.43,0)
  body extent -137,-137 137,137, height 150
IDC-Header_2x05_P2.54mm [mm] "IDC-Header_2x05_P2.54mm"
  round 1.7 hole 1: 1(-1.27,5.08) 2(1.27,5.08) 3(-1.27,2.54) 4(1.27,2.54) 5(-1.27,0) 6(1.27,0) 7(-1.27,-2.54) 8(1.27,-2.54) 9(-1.27,-5.08) 10(1.27,-5.08)
  body extent -2.13,-5.94 2.13,5.94, height 1.27
L_4x4 [mil] "L_4x4"
  rrect30% 59.06x137.8 smd: 1(-62.99,0) 2(62.99,0)
  body extent -101,-101 101,101, height 150
L_0402 [mil] "L_0402"
  rrect30% 23.62x19.69 smd: 1(-19.69,0) 2(19.69,0)
  body extent -40,-40 40,40, height 150
L_0603 [mil] "L_0603"
  rrect30% 35.43x31.5 smd: 1(-29.53,0) 2(29.53,0)
  body extent -56,-56 56,56, height 150
L_XEL4030 [mil] "L_XEL4030"
  rrect30% 59.06x137.8 smd: 1(-62.99,0) 2(62.99,0)
  body extent -101,-101 101,101, height 150
LED_0603 [mil] "LED_0603"
  rrect30% 35.43x31.5 smd: 1(-29.53,0) 2(29.53,0)
  body extent -56,-56 56,56, height 150
LGA-14L_2.5x3 [mm] "LGA-14L_2.5x3"
  rrect30% 0.3x0.175 smd: 1(2.5,0) 2(4,0) 3(4.5,0) 4(3,0) 5(0.5,0) 6(6,0) 7(6.5,0) 8(0,0) 9(3.5,0) 10(5,0) 11(5.5,0) 12(1,0) 13(1.5,0) 14(2,0)
  body extent -4.27,-1.27 6.65,1.27, height 3.81
LQFN-12_2x2 [mm] "LQFN-12_2x2"
  rrect30% 0.3x0.175 smd: 1(-0.75,-0.5) 2(-0.75,0) 3(-0.75,0.5) 4(-0.25,0.75) 5(0.25,0.75) 6(0.75,0.5) 7(0.75,0) 8(0.75,-0.5) 9(0.25,-0.75) 10(-0.25,-0.75) 11(0.5,-0.25) 12(-0.5,-0.25)
  rect 0.8x0.8 smd: 13(0,0)
  body extent -1.27,-1.27 1.27,1.27, height 3.81
LQFP-64_10x10 [mm] "LQFP-64_10x10"
  rrect30% 0.3x0.175 smd: 1(-5.7,-3.75) 2(-5.7,-3.25) 3(-5.7,-2.75) 4(-5.7,-2.25) 5(-5.7,-1.75) 6(-5.7,-1.25) 7(-5.7,-0.75) 8(-5.7,-0.25) 9(-5.7,0.25) 10(-5.7,0.75) 11(-5.7,1.25) 12(-5.7,1.75) 13(-5.7,2.25) 14(-5.7,2.75) 15(-5.7,3.25) 16(-5.7,3.75) 17(-3.75,5.7) 18(-3.25,5.7) 19(-2.75,5.7) 20(-2.25,5.7) 21(-1.75,5.7) 22(-1.25,5.7) 23(-0.75,5.7) 24(-0.25,5.7) 25(0.25,5.7) 26(0.75,5.7) 27(1.25,5.7) 28(1.75,5.7) 29(2.25,5.7) 30(2.75,5.7) 31(3.25,5.7) 32(3.75,5.7) 33(5.7,3.75) 34(5.7,3.25) 35(5.7,2.75) 36(5.7,2.25) 37(5.7,1.75) 38(5.7,1.25) 39(5.7,0.75) 40(5.7,0.25) 41(5.7,-0.25) 42(5.7,-0.75) 43(5.7,-1.25) 44(5.7,-1.75) 45(5.7,-2.25) 46(5.7,-2.75) 47(5.7,-3.25) 48(5.7,-3.75) 49(3.75,-5.7) 50(3.25,-5.7) 51(2.75,-5.7) 52(2.25,-5.7) 53(1.75,-5.7) 54(1.25,-5.7) 55(0.75,-5.7) 56(0.25,-5.7) 57(-0.25,-5.7) 58(-0.75,-5.7) 59(-1.25,-5.7) 60(-1.75,-5.7) 61(-2.25,-5.7) 62(-2.75,-5.7) 63(-3.25,-5.7) 64(-3.75,-5.7)
  body extent -5.85,-5.79 5.85,5.79, height 3.81
Molex_Micro-Fit_43045-0600_2x3_RA [mm] "Molex_Micro-Fit_43045-0600_2x3_RA"
  rrect30% 1.8x1.05 smd: 1(0,0) 2(3,0) 3(6,0) 4(9,0) 5(12,0) 6(15,0)
  body extent -9.77,-1.27 15.9,1.27, height 3.81
MSOP-8 [mil] "MSOP-8"
  rrect30% 15.35x8.94 smd: 1(-86.61,-38.39) 2(-86.61,-12.8) 3(-86.61,12.8) 4(-86.61,38.39) 5(86.61,38.39) 6(86.61,12.8) 7(86.61,-12.8) 8(86.61,-38.39)
  body extent -94,-70 94,70, height 150
OSC_2.5x2.0 [mil] "OSC_2.5x2.0"
  rrect30% 18.9x11.02 smd: 1(-31.5,23.62) 2(31.5,23.62) 3(31.5,-23.62) 4(-31.5,-23.62)
  body extent -60,-50 60,50, height 150
OSLON_Black_3.75x3.75 [mm] "OSLON_Black_3.75x3.75"
  rrect30% 1.2x0.7 smd: 1(0,0) 2(2,0)
  body extent -2.77,-1.27 2.77,1.27, height 3.81
PG-TDSON-8 [mm] "PG-TDSON-8"
  rrect30% 0.39x0.227 smd: 1(-1.1,-0.75) 2(-1.1,-0.25) 3(-1.1,0.25) 4(-1.1,0.75) 5(1.1,0.75) 6(1.1,0.25) 7(1.1,-0.25) 8(1.1,-0.75)
  rect 4x4 smd: TAB(0,0)
  body extent -2.84,-3.34 2.84,3.34, height 3.81
PG-TSDSON-8 [mm] "PG-TSDSON-8"
  rrect30% 0.39x0.227 smd: 1(-1.1,-0.75) 2(-1.1,-0.25) 3(-1.1,0.25) 4(-1.1,0.75) 5(1.1,0.75) 6(1.1,0.25) 7(1.1,-0.25) 8(1.1,-0.75)
  rect 4x4 smd: TAB(0,0)
  body extent -2.84,-3.34 2.84,3.34, height 3.81
PinHeader_1x03_P2.54mm [mm] "PinHeader_1x03_P2.54mm"
  round 1.7 hole 1: 1(0,2.54) 2(0,0) 3(0,-2.54)
  body extent -0.86,-3.4 0.86,3.4, height 1.27
PinHeader_1x06_P2.54mm [mm] "PinHeader_1x06_P2.54mm"
  round 1.7 hole 1: 1(0,6.35) 2(0,3.81) 3(0,1.27) 4(0,-1.27) 5(0,-3.81) 6(0,-6.35)
  body extent -0.86,-7.21 0.86,7.21, height 1.27
PinHeader_2x02_P2.54mm [mm] "PinHeader_2x02_P2.54mm"
  round 1.7 hole 1: 1(-1.27,1.27) 2(1.27,1.27) 3(-1.27,-1.27) 4(1.27,-1.27)
  body extent -2.13,-2.13 2.13,2.13, height 1.27
QFN-18_3x4_UDC [mm] "QFN-18_3x4_UDC"
  rrect30% 0.3x0.175 smd: 1(-1.25,-0.25) 2(-1.25,0.25) 3(-0.75,0.25) 4(-1.25,0.75) 6(0.25,-0.25) 7(0.75,-0.25) 8(-0.25,0.25) 9(0.25,0.25) 10(-1.25,-0.75) 11(-0.75,-0.75) 13(-0.75,0.75) 14(-0.25,0.75) 15(0.75,0.75) 16(0.25,0.75) 17(1.25,0.75) 18(1.25,-0.25) 19(-0.25,-0.25) 20(-0.75,-0.25) 21(0.75,0.25) 22(1.25,0.25)
  body extent -1.77,-2.27 1.77,2.27, height 3.81
R_0402 [mil] "R_0402"
  rrect30% 23.62x19.69 smd: 1(-19.69,0) 2(19.69,0)
  body extent -40,-40 40,40, height 150
R_0603 [mil] "R_0603"
  rrect30% 35.43x31.5 smd: 1(-29.53,0) 2(29.53,0)
  body extent -56,-56 56,56, height 150
R_0805 [mil] "R_0805"
  rrect30% 47.24x43.31 smd: 1(-37.4,0) 2(37.4,0)
  body extent -70,-70 70,70, height 150
R_1206 [mil] "R_1206"
  rrect30% 62.99x47.24 smd: 1(-57.09,0) 2(57.09,0)
  body extent -97,-97 97,97, height 150
SOIC-8 [mil] "SOIC-8"
  rrect30% 30x17.48 smd: 1(-106.3,-75) 2(-106.3,-25) 3(-106.3,25) 4(-106.3,75) 5(106.3,75) 6(106.3,25) 7(106.3,-25) 8(106.3,-75)
  body extent -122,-109 122,109, height 150
SOIC-16W_7.5x10.3 [mil] "SOIC-16W_7.5x10.3"
  rrect30% 30x17.48 smd: 1(-185.04,-175) 2(-185.04,-125) 3(-185.04,-75) 4(-185.04,-25) 5(-185.04,25) 6(-185.04,75) 7(-185.04,125) 8(-185.04,175) 9(185.04,175) 10(185.04,125) 11(185.04,75) 12(185.04,25) 13(185.04,-25) 14(185.04,-75) 15(185.04,-125) 16(185.04,-175)
  body extent -200,-213 200,213, height 150
SOT-23 [mm] "SOT-23"
  rrect30% 0.57x0.332 smd: 1(-1,0.95) 2(1,0.95) 3(0,-0.95)
  body extent -1.72,-1.47 1.72,1.47, height 3.81
SOT-23-5 [mm] "SOT-23-5"
  rrect30% 0.57x0.332 smd: 1(-0.95,1) 2(0,1) 3(0.95,1) 4(0.95,-1) 5(-0.95,-1)
  body extent -1.72,-1.67 1.72,1.67, height 3.81
SOT-23-6 [mm] "SOT-23-6"
  rrect30% 0.57x0.332 smd: 1(-0.95,1) 2(0,1) 3(0.95,1) 4(0.95,-1) 5(0,-1) 6(-0.95,-1)
  body extent -1.72,-1.67 1.72,1.67, height 3.81
TC2030-IDC-NL [mil] "TC2030-IDC-NL"
  rrect30% 30x17.48 smd: 1(0,0) 2(50,0) 3(100,0) 4(150,0) 5(200,0) 6(250,0)
  body extent -180,-50 265,50, height 150
TP_1.0mm [mm] "TP_1.0mm"
  round 1.8 hole 1: 1(0,0)
  body extent -0.91,-0.91 0.91,0.91, height 1.27
TSOT-23-5 [mm] "TSOT-23-5"
  rrect30% 0.57x0.332 smd: 1(-0.95,1) 2(0,1) 3(0.95,1) 4(0.95,-1) 5(-0.95,-1)
  body extent -1.72,-1.67 1.72,1.67, height 3.81
TSOT-23-6 [mm] "TSOT-23-6"
  rrect30% 0.57x0.332 smd: 1(-0.95,1) 2(0,1) 3(0.95,1) 4(0.95,-1) 5(0,-1) 6(-0.95,-1)
  body extent -1.72,-1.67 1.72,1.67, height 3.81
u-blox_LCC-18_9.7x10.1 [mm] "u-blox_LCC-18_9.7x10.1"
  rrect30% 0.66x0.385 smd: 1(16.5,0) 2(5.5,0) 3(4.4,0) 4(6.6,0) 5(7.7,0) 6(2.2,0) 7(1.1,0) 8(0,0) 9(8.8,0) 10(17.6,0) 11(13.2,0) 12(18.7,0) 13(14.3,0) 14(15.4,0) 15(3.3,0) 16(11,0) 17(12.1,0) 18(9.9,0)
  body extent -10.67,-1.27 19.03,1.27, height 3.81
U.FL_Hirose [mm] "U.FL_Hirose"
  rrect30% 0.9x0.525 smd: 1(0,0) 2(1.5,0) 3(3,0)
  body extent -3.02,-1.27 3.46,1.27, height 3.81
USB_C_GCT_USB4105 [mm] "USB_C_GCT_USB4105"
  rrect30% 0.3x0.175 smd: A1(6,0) A4(0,0) A5(2,0) A6(4,0) A7(5,0) A8(3,0) A9(0.5,0) A12(6.5,0) B1(7,0) B4(1,0) B5(2.5,0) B6(4.5,0) B7(5.5,0) B8(3.5,0) B9(1.5,0) B12(7.5,0) S1(8,0)
  body extent -5.02,-1.27 8.15,1.27, height 3.81
VL53L4CD_LGA12 [mm] "VL53L4CD_LGA12"
  rrect30% 0.48x0.28 smd: 1(0.8,0) 2(4.8,0) 3(5.6,0) 4(6.4,0) 5(1.6,0) 6(7.2,0) 7(4,0) 8(8.8,0) 9(3.2,0) 10(2.4,0) 11(0,0) 12(8,0)
  body extent -5.57,-1.27 9.04,1.27, height 3.81

## Part data
C201: library part C_CP_Elec_8x10, PackageName=C_CP_Elec_8x10
C202 C216 C220 C230 C240 C305 C432 C433 C451 C455 C462 C511 C520 C602 C605 C607 C609 C610 C702 C704 C706: library part C_0603, PackageName=C_0603
C203 C204 C223 C224 C225 C226 C233 C234 C243 C244: library part C_0805, PackageName=C_0805
C205 C206 C212 C213 C214 C215 C403 C404 C431 C523 C524: library part C_1210, PackageName=C_1210
C207 C208 C209 C210 C211 C221 C222 C231 C232 C241 C242 C250 C251 C301 C302 C303 C304 C306 C307 C308 C309 C310 C311 C312 C313 C314 C401 C402 C405 C406 C407 C408 C409 C410 C411 C412 C413 C414 C415 C416 C417 C418 C419 C420 C421 C422 C423 C424 C425 C426 C427 C428 C429 C430 C434 C435 C436 C437 C438 C439 C440 C441 C442 C443 C444 C445 C446 C447 C448 C449 C450 C452 C453 C454 C456 C457 C458 C459 C460 C461 C463 C464 C501 C512 C521 C525 C526 C601 C603 C604 C606 C608 C611 C612 C613 C614 C701 C703: library part C_0402, PackageName=C_0402
C522: library part C_CP_Elec_6.3x7.7, PackageName=C_CP_Elec_6.3x7.7
C705: library part C_1206, PackageName=C_1206
D1: library part D_SMB, PackageName=D_SMB
D2: library part D_SOD-128, PackageName=D_SOD-128
D3 Q3 Q4 Q5: library part SOT-23, PackageName=SOT-23
D4: library part D_SOD-123W, PackageName=D_SOD-123W
F1: library part Fuse_Nano2_452, PackageName=Fuse_Nano2_452
FB301 L601: library part L_0402, PackageName=L_0402
FB401 FB402 FB501: library part L_0603, PackageName=L_0603
J1: library part Molex_Micro-Fit_43045-0600_2x3_RA, PackageName=Molex_Micro-Fit_43045-0600_2x3_RA
J2: library part USB_C_GCT_USB4105, PackageName=USB_C_GCT_USB4105
J3: library part IDC-Header_2x05_P2.54mm, PackageName=IDC-Header_2x05_P2.54mm
J4: library part TC2030-IDC-NL, PackageName=TC2030-IDC-NL
J5: library part FH12-22S-0.5SH, PackageName=FH12-22S-0.5SH
J6: library part PinHeader_1x03_P2.54mm, PackageName=PinHeader_1x03_P2.54mm
J7: library part U.FL_Hirose, PackageName=U.FL_Hirose
J9: library part PinHeader_1x06_P2.54mm, PackageName=PinHeader_1x06_P2.54mm
JP1: library part PinHeader_2x02_P2.54mm, PackageName=PinHeader_2x02_P2.54mm
L201 L501: library part L_XEL4030, PackageName=L_XEL4030
L202 L203 L204: library part L_4x4, PackageName=L_4x4
LED1 LED2 LED3 LED4: library part OSLON_Black_3.75x3.75, PackageName=OSLON_Black_3.75x3.75
LED5 LED6 LED7: library part LED_0603, PackageName=LED_0603
Q1: library part PG-TDSON-8, PackageName=PG-TDSON-8
Q2: library part PG-TSDSON-8, PackageName=PG-TSDSON-8
R201 R202 R203 R204 R205 R206 R207 R210 R211 R212 R213 R214 R215 R216 R217 R218 R219 R301 R302 R303 R304 R305 R306 R401 R402 R403 R404 R405 R406 R407 R408 R409 R410 R411 R412 R413 R414 R415 R416 R417 R418 R419 R420 R421 R501 R502 R503 R504 R505 R506 R507 R508 R509 R510 R511 R520 R521 R522 R523 R524 R525 R526 R528 R529 R530 R531 R532 R601 R603 R604 R605 R606 R607 R608 R611 R612 R618 R619 R703 R704 R705: library part R_0402, PackageName=R_0402
R527: library part R_1206, PackageName=R_1206
R610: library part R_0603, PackageName=R_0603
R701 R702: library part R_0805, PackageName=R_0805
TP201 TP202 TP203 TP204 TP205 TP206 TP207 TP208 TP209 TP210 TP601 TP701 TP702 TP703 TP704: library part TP_1.0mm, PackageName=TP_1.0mm
U1: library part MSOP-8, PackageName=MSOP-8
U2: library part QFN-18_3x4_UDC, PackageName=QFN-18_3x4_UDC
U3 U4 U5: library part LQFN-12_2x2, PackageName=LQFN-12_2x2
U6: library part LQFP-64_10x10, PackageName=LQFP-64_10x10
U7: library part FBGA-484_23x23_1.0mm, PackageName=FBGA-484_23x23_1.0mm
U8: library part SOIC-16W_7.5x10.3, PackageName=SOIC-16W_7.5x10.3
U9: library part LGA-14L_2.5x3, PackageName=LGA-14L_2.5x3
U10 U11 U12: library part VL53L4CD_LGA12, PackageName=VL53L4CD_LGA12
U13: library part u-blox_LCC-18_9.7x10.1, PackageName=u-blox_LCC-18_9.7x10.1
U14: library part SOIC-8, PackageName=SOIC-8
U15: library part SOT-23-6, PackageName=SOT-23-6
U16 U17: library part TSOT-23-5, PackageName=TSOT-23-5
U18: library part TSOT-23-6, PackageName=TSOT-23-6
U19: library part SOT-23-5, PackageName=SOT-23-5
X1: library part OSC_2.5x2.0, PackageName=OSC_2.5x2.0
Y1: library part Crystal_3225_4pad, PackageName=Crystal_3225_4pad

## Nets (pads, with @x,y where several pads share a name; then routed paths per layer and width w, separated by ;. In a path a pad name is that pad's centre, name@x,y a point inside that pad or via, vN(x,y) a via of type N, cw(c..) or ccw(c..) an arc to the next point about the centre after c; other vN are vias at no path point)
1V1: C222.1 C223.1 C224.1 C225.1 C226.1 C403.1 C404.1 C405.1 C406.1 C407.1 C408.1 C409.1 C410.1 C411.1 C412.1 C413.1 C414.1 C415.1 C416.1 C417.1 C418.1 C419.1 C420.1 C421.1 C422.1 C423.1 C424.1 C425.1 C426.1 C427.1 C428.1 C429.1 C430.1 L202.2 R210.1 TP204.1 U7.J4 U7.J10 U7.J12 U7.J14 U7.J16 U7.K3 U7.K5 U7.K11 U7.K13 U7.K15 U7.L4 U7.L10 U7.L12 U7.L14 U7.L16 U7.M11 U7.M13 U7.M15 U7.N4 U7.N10 U7.N12 U7.N14 U7.P3 U7.P11 U7.P13 U7.P15
1V2: C251.1 C455.1 C456.1 C457.1 C458.1 R501.1 TP207.1 U7.A6 U7.C7 U7.E8 U7.G7 U17.5
2V5: C232.1 C233.1 C234.1 C250.1 C451.1 C452.1 C453.1 C454.1 FB401.1 FB402.1 L203.2 R213.1 TP205.1 U7.A3 U7.A16 U7.B19 U7.C10 U7.C12 U7.C22 U7.D8 U7.D14 U7.D15 U7.D16 U7.E11 U7.E18 U7.F11 U7.F21 U7.G14 U7.H17 U17.1 U17.3
3V3: C242.1 C243.1 C244.1 C301.1 C302.1 C303.1 C304.1 C305.1 C306.1 C401.1 C402.1 C431.1 C432.1 C433.1 C434.1 C435.1 C436.1 C437.1 C438.1 C439.1 C440.1 C441.1 C442.1 C443.1 C444.1 C445.1 C446.1 C447.1 C448.1 C449.1 C450.1 C601.1 C602.1 C603.1 C604.1 C605.1 C606.1 C607.1 C608.1 C609.1 C610.1 C611.1 C703.1 FB301.1 FB501.1 J3.4 J4.1 J9.1 L204.2 R216.1 R218.2 R219.1 R401.2 R403.2 R405.2 R407.2 R409.2 R411.2 R412.2 R413.2 R414.2 R416.2 R417.2 R418.2 R421.1 R520.2 R521.2 R601.2 R603.2 R604.2 R605.2 R606.2 R607.2 R608.2 R618.2 R619.2 TP206.1 U6.1 U6.16 U6.32 U6.48 U6.64 U7.AA16 U7.AA21 U7.D4 U7.E1 U7.F8 U7.J1 U7.J2 U7.K18 U7.M17 U7.M19 U7.N18 U7.P20 U7.P21 U7.R1 U7.R2 U7.R8 U7.R18 U7.R19 U7.T6 U7.T11 U7.U14 U7.U19 U7.V8 U7.W6 U7.W10 U7.W11 U7.W12 U7.W14 U7.W15 U7.W17 U7.W20 U7.Y4 U7.Y8 U7.Y13 U8.2 U8.3 U9.5 U9.8 U10.1 U10.11 U11.1 U11.11 U12.1 U12.11 U13.7 U13.8 U14.5 X1.1 X1.4
5V0: C210.1 C211.1 C212.1 C213.1 C214.1 C215.1 C220.1 C221.1 C230.1 C231.1 C240.1 C241.1 C520.1 C525.1 C701.1 C702.1 D2.1 L201.2 L501.1 R205.1 R207.2 R212.2 R215.2 TP203.1 U2.1 U3.3 U3.8 U3.10 U4.3 U4.8 U4.10 U5.3 U5.8 U5.10 U14.3 U16.5 U18.6
BOOT0: R301.1 U6.61
CAM_3V3: C511.1 C512.1 FB501.2 J5.22
CAM_EN: J5.17 R522.1 U6.33
CAM_FSIN: J6.1 R523.2 R524.1
CAM_FSIN_3V3: R523.1 U7.Y22
CAM_I2C_SCL: J5.20 R520.1 U6.40
CAM_I2C_SDA: J5.21 R521.1 U6.41
CAM_IO1: J5.18 U7.W22
CAM_STROBE: R528.1 U7.AA22
CAN_RX: U6.58 U14.4
CAN_SPLIT: C704.1 R701.2 R702.2
CAN_STB: U6.57 U14.8
CAN_TX: U6.59 U14.1
CANH: D3.1 J1.3 JP1.1 TP701.1 U14.7
CANH_T: JP1.2 R701.1
CANL: D3.2 J1.4 JP1.3 TP702.1 U14.6
CANL_T: JP1.4 R702.1
FB_1V1: C222.2 R210.2 R211.1 U5.12
FB_2V5: C232.2 R213.2 R214.1 U4.12
FB_3V3: C242.2 R216.2 R217.1 U3.12
FPGA_AS_DATA0: U7.AB4 U8.15
FPGA_AS_DATA1: U7.AB3 U8.8
FPGA_AS_DATA2: U7.AA5 U8.9
FPGA_AS_DATA3: U7.T4 U8.1
FPGA_AS_DCLK: U7.V3 U8.16
FPGA_AS_NCS: R418.1 U7.R4 U8.7
FPGA_CLK50: R420.2 U7.W16
FPGA_CONF_DONE: Q5.1 R413.1 U6.43 U7.K6
FPGA_INIT_DONE: R414.1 U6.44 U7.T18
FPGA_IO0: J9.2 U7.Y21
FPGA_IO1: J9.3 U7.W21
FPGA_IO2: J9.4 U7.V21
FPGA_IO3: J9.5 U7.U21
FPGA_IRQ: R305.1 U6.13 U7.AB20
FPGA_MSEL0: R409.1 R410.1 U7.L6
FPGA_MSEL1: R407.1 R408.1 U7.J6
FPGA_MSEL2: R405.1 R406.1 U7.A2
FPGA_MSEL3: R403.1 R404.1 U7.E5
FPGA_MSEL4: R401.1 R402.1 U7.F3
FPGA_NCONFIG: R411.1 U6.42 U7.A4
FPGA_NSTATUS: R412.1 U6.52 U7.H5
FPGA_RREF: R419.1 U7.A1
FPGA_RST_N: U6.39 U7.AB21
FPGA_TCK: J3.1 R415.1 U7.V5
FPGA_TDI: J3.9 R417.1 U7.W5
FPGA_TDO: J3.3 U7.M5
FPGA_TMS: J3.5 R416.1 U7.P5
FPGA_VCCA_FPLL: C462.1 C463.1 C464.1 FB402.2 U7.F4 U7.H19 U7.M3 U7.T3 U7.T5 U7.U18
FPGA_VCCAUX: C459.1 C460.1 C461.1 FB401.2 U7.D11 U7.D18 U7.E6 U7.W7 U7.W13 U7.W18
FPGA_VREF_8A: C501.1 R501.2 R502.1 U7.B8
GND: C201.2 C202.2 C203.2 C204.2 C205.2 C206.2 C207.2 C208.2 C211.2 C212.2 C213.2 C214.2 C215.2 C216.2 C220.2 C221.2 C223.2 C224.2 C225.2 C226.2 C230.2 C231.2 C233.2 C234.2 C240.2 C241.2 C243.2 C244.2 C250.2 C251.2 C301.2 C302.2 C303.2 C304.2 C305.2 C306.2 C307.2 C308.2 C309.2 C310.2 C311.2 C312.2 C313.2 C314.2 C401.2 C402.2 C403.2 C404.2 C405.2 C406.2 C407.2 C408.2 C409.2 C410.2 C411.2 C412.2 C413.2 C414.2 C415.2 C416.2 C417.2 C418.2 C419.2 C420.2 C421.2 C422.2 C423.2 C424.2 C425.2 C426.2 C427.2 C428.2 C429.2 C430.2 C431.2 C432.2 C433.2 C434.2 C435.2 C436.2 C437.2 C438.2 C439.2 C440.2 C441.2 C442.2 C443.2 C444.2 C445.2 C446.2 C447.2 C448.2 C449.2 C450.2 C451.2 C452.2 C453.2 C454.2 C455.2 C456.2 C457.2 C458.2 C459.2 C460.2 C461.2 C462.2 C463.2 C464.2 C501.2 C511.2 C512.2 C520.2 C521.2 C522.2 C523.2 C524.2 C525.2 C601.2 C602.2 C603.2 C604.2 C605.2 C606.2 C607.2 C608.2 C609.2 C610.2 C611.2 C613.2 C614.2 C701.2 C702.2 C703.2 C704.2 C705.2 C706.2 D1.2 D3.3 J1.2 J1.5 J2.A1 J2.A12 J2.B1 J2.B12 J3.2 J3.10 J4.5 J5.1 J5.4 J5.7 J5.10 J5.13 J5.16 J5.19 J5.MP1 J5.MP2 J6.2 J7.2 J7.3 J9.6 LED5.1 LED7.1 Q4.2 Q5.2 R203.2 R204.2 R206.2 R211.2 R214.2 R217.2 R301.2 R304.2 R305.2 R306.2 R402.2 R404.2 R406.2 R408.2 R410.2 R415.2 R419.2 R502.2 R522.2 R524.2 R526.2 R527.2 R529.2 R532.2 R703.2 R704.2 R705.2 TP208.1 TP703.1 TP704.1 U1.6 U2.6 U2.7 U2.10 U2.11 U2.18 U3.1 U3.4 U3.7 U3.13 U4.1 U4.4 U4.7 U4.13 U5.1 U5.4 U5.7 U5.13 U6.15 U6.27 U6.31 U6.47 U6.63 U7.A11 U7.A21 U7.AA3 U7.AA4 U7.AA6 U7.AA11 U7.AB1 U7.AB2 U7.AB9 U7.AB13 U7.AB14 U7.AB16 U7.AB19 U7.B1 U7.B2 U7.B9 U7.B11 U7.B14 U7.C3 U7.C4 U7.C5 U7.C14 U7.C17 U7.D1 U7.D2 U7.D5 U7.D10 U7.D20 U7.E3 U7.E4 U7.E13 U7.F1 U7.F2 U7.F5 U7.F6 U7.F16 U7.F17 U7.G3 U7.G4 U7.G5 U7.G9 U7.G19 U7.H1 U7.H2 U7.H3 U7.H4 U7.H7 U7.H12 U7.H22 U7.J3 U7.J5 U7.J15 U7.J20 U7.K1 U7.K2 U7.K4 U7.K8 U7.K10 U7.K12 U7.K14 U7.L3 U7.L5 U7.L11 U7.L13 U7.L15 U7.L20 U7.L21 U7.M1 U7.M2 U7.M4 U7.M10 U7.M12 U7.M14 U7.N3 U7.N5 U7.N7 U7.N11 U7.N13 U7.N15 U7.N17 U7.N22 U7.P1 U7.P2 U7.P4 U7.P10 U7.P22 U7.R3 U7.R13 U7.R20 U7.R21 U7.T1 U7.T2 U7.T8 U7.T16 U7.T19 U7.T21 U7.U3 U7.U4 U7.U5 U7.U9 U7.V1 U7.V2 U7.V4 U7.V7 U7.V12 U7.V17 U7.V22 U7.W1 U7.W3 U7.W4 U7.Y1 U7.Y2 U7.Y5 U7.Y7 U7.Y12 U7.Y18 U8.10 U9.2 U9.3 U9.6 U9.7 U10.2 U10.3 U10.4 U10.6 U10.12 U11.2 U11.3 U11.4 U11.6 U11.12 U12.2 U12.3 U12.4 U12.6 U12.12 U13.1 U13.10 U13.12 U14.2 U15.2 U16.2 U17.2 U18.2 U19.3 X1.2 Y1.2 Y1.4
GNSS_ANT: C612.1 J7.1 L601.1
GNSS_ANT_GATE: Q3.1 Q4.3 R611.1
GNSS_ANT_OFF_N: Q4.1 U13.13
GNSS_ANT_PWR: C613.1 L601.2 R610.2 U19.2
GNSS_ANT_SHORT_N: R612.1 U13.5 U19.4
GNSS_ANT_SW: Q3.3 R610.1
GNSS_PPS: U6.12 U7.AA20 U13.4
GNSS_RESET_N: U6.30 U13.9
GNSS_RF_IN: C612.2 U13.11
GNSS_RX: U6.14 U13.3
GNSS_SAFEBOOT_N: TP601.1 U13.18
GNSS_TX: U6.17 U13.2
GNSS_VCC_RF: C614.1 Q3.2 R611.2 R612.2 U13.14 U19.5
HSE_IN: C311.1 U6.5 Y1.1
HSE_OUT: C312.1 U6.6 Y1.3
I2C1_SCL: R618.1 U6.51 U10.10 U11.10 U12.10
I2C1_SDA: R619.1 U6.60 U10.9 U11.9 U12.9
IMU_INT1: U6.22 U9.4
IMU_INT2: U6.23 U7.AA19 U9.9
IR_DRAIN: LED4.1 Q2.5 Q2.6 Q2.7 Q2.8
IR_EN: R306.1 U6.62 U18.4
IR_FB: C526.2 R530.2 U16.4
IR_GATE: Q2.4 R531.2 R532.1
IR_K1: LED1.1 LED2.2
IR_K2: LED2.1 LED3.2
IR_K3: LED3.1 LED4.2
IR_OPAMP_OUT: C526.1 R531.1 U16.1
IR_SENSE: Q2.1 Q2.2 Q2.3 Q2.TAB R527.1 R530.1
IR_SET: R528.2 R529.1 U16.3
LED_DONE_A: LED6.2 R421.2
LED_DONE_K: LED6.1 Q5.3
LED_MCU: R302.1 U6.38
LED_MCU_A: LED7.2 R302.2
LED_PWR_A: LED5.2 R219.2
LT8330_FBX: R525.2 R526.1 U18.3
LT8330_INTVCC: C521.1 U18.5
LT8641_BST: C209.1 U2.3
LT8641_EN: R202.2 R203.1 U2.14
LT8641_FB: C210.2 R205.2 R206.1 U2.20
LT8641_INTVCC: C208.1 U2.2 U2.17
LT8641_RT: R204.1 U2.15
LT8641_SS: C207.1 U2.16
LTC4359_SHDN: R201.1 U1.5
MIPI_CLK_LP_N: R505.2 U7.B5
MIPI_CLK_LP_P: R504.2 U7.A5
MIPI_CLK_N: J5.8 R503.2 R505.1 U7.F9
MIPI_CLK_P: J5.9 R503.1 R504.1 U7.E10
MIPI_D0_LP_N: R508.2 U7.B7
MIPI_D0_LP_P: R507.2 U7.B6
MIPI_D0_N: J5.2 R506.2 R508.1 U7.A7
MIPI_D0_P: J5.3 R506.1 R507.1 U7.A8
MIPI_D1_LP_N: R511.2 U7.A9
MIPI_D1_LP_P: R510.2 U7.A10
MIPI_D1_N: J5.5 R509.2 R511.1 U7.C9
MIPI_D1_P: J5.6 R509.1 R510.1 U7.B10
NRST: C313.1 J4.3 U6.7
OSC50_OUT: R420.1 X1.3
PG_1V1: R212.1 TP210.1 U4.2 U5.11
PG_2V5: R215.1 U3.2 U4.11
PG_3V3: R218.1 U3.11 U6.53
PG_5V0: R207.1 TP209.1 U2.19 U5.2
Q1_GATE: Q1.4 U1.1
SPI1_MISO: U6.20 U9.1
SPI1_MOSI: U6.21 U9.14
SPI1_NSS: R601.1 U6.18 U9.12
SPI1_SCK: U6.19 U9.13
SPI2_MISO: U6.36 U7.AA17
SPI2_MOSI: U6.37 U7.AB18
SPI2_NSS: U6.34 U7.AA18
SPI2_SCK: U6.35 U7.AB17
SW_1V1: L202.1 U5.5 U5.6
SW_2V5: L203.1 U4.5 U4.6
SW_3V3: L204.1 U3.5 U3.6
SW_5V0: C209.2 L201.1 U2.8 U2.9 U2.21 U2.22
SW_VLED: D4.2 L501.2 U18.1
SWCLK: J4.4 U6.50
SWDIO: J4.2 U6.49
SWO: J4.6 U6.56
TOF1_INT: R604.1 U6.24 U10.7
TOF1_XSHUT: R603.1 U6.8 U10.5
TOF2_INT: R606.1 U6.25 U11.7
TOF2_XSHUT: R605.1 U6.9 U11.5
TOF3_INT: R608.1 U6.26 U12.7
TOF3_XSHUT: R607.1 U6.10 U12.5
USB_CC1: J2.A5 R703.1
USB_CC2: J2.B5 R704.1
USB_DM: J2.A7 J2.B7 U6.45 U15.3 U15.4
USB_DP: J2.A6 J2.B6 U6.46 U15.1 U15.6
USB_SHIELD: C705.1 J2.S1 R705.1
VBAT_FUSED: C216.1 D1.1 F1.2 Q1.1 Q1.2 Q1.3 Q1.TAB R201.2 U1.2 U1.4
VBAT_IN: F1.1 J1.1 TP201.1
VBAT_PROT: C201.1 C202.1 C203.1 C204.1 C205.1 C206.1 Q1.5 Q1.6 Q1.7 Q1.8 R202.1 R303.1 TP202.1 U1.8 U2.4 U2.13
VBAT_SENSE: C314.1 R303.2 R304.1 U6.11
VBUS_USB: C706.1 D2.2 J2.A4 J2.A9 J2.B4 J2.B9 U15.5
VDDA_MCU: C307.1 C308.1 C309.1 C310.1 FB301.2 U6.28 U6.29
VLED: C522.1 C523.1 C524.1 D4.1 LED1.2 R525.1
pads on no net: J1.6 J2.A8 J2.B8 J3.6 J3.7 J3.8 J5.11 J5.12 J5.14 J5.15 J6.3 U1.3 U1.7 U3.9 U4.9 U5.9 U6.2 U6.3 U6.4 U6.54 U6.55 U7.A12 U7.A13 U7.A14 U7.A15 U7.A17 U7.A18 U7.A19 U7.A20 U7.A22 U7.AA1 U7.AA2 U7.AA7 U7.AA8 U7.AA9 U7.AA10 U7.AA12 U7.AA13 U7.AA14 U7.AA15 U7.AB5 U7.AB6 U7.AB7 U7.AB8 U7.AB10 U7.AB11 U7.AB12 U7.AB15 U7.AB22 U7.B3 U7.B4 U7.B12 U7.B13 U7.B15 U7.B16 U7.B17 U7.B18 U7.B20 U7.B21 U7.B22 U7.C1 U7.C2 U7.C6 U7.C8 U7.C11 U7.C13 U7.C15 U7.C16 U7.C18 U7.C19 U7.C20 U7.C21 U7.D3 U7.D6 U7.D7 U7.D9 U7.D12 U7.D13 U7.D17 U7.D19 U7.D21 U7.D22 U7.E2 U7.E7 U7.E9 U7.E12 U7.E14 U7.E15 U7.E16 U7.E17 U7.E19 U7.E20 U7.E21 U7.E22 U7.F7 U7.F10 U7.F12 U7.F13 U7.F14 U7.F15 U7.F18 U7.F19 U7.F20 U7.F22 U7.G1 U7.G2 U7.G6 U7.G8 U7.G10 U7.G11 U7.G12 U7.G13 U7.G15 U7.G16 U7.G17 U7.G18 U7.G20 U7.G21 U7.G22 U7.H6 U7.H8 U7.H9 U7.H10 U7.H11 U7.H13 U7.H14 U7.H15 U7.H16 U7.H18 U7.H20 U7.H21 U7.J7 U7.J8 U7.J9 U7.J11 U7.J13 U7.J17 U7.J18 U7.J19 U7.J21 U7.J22 U7.K7 U7.K9 U7.K16 U7.K17 U7.K19 U7.K20 U7.K21 U7.K22 U7.L1 U7.L2 U7.L7 U7.L8 U7.L9 U7.L17 U7.L18 U7.L19 U7.L22 U7.M6 U7.M7 U7.M8 U7.M9 U7.M16 U7.M18 U7.M20 U7.M21 U7.M22 U7.N1 U7.N2 U7.N6 U7.N8 U7.N9 U7.N16 U7.N19 U7.N20 U7.N21 U7.P6 U7.P7 U7.P8 U7.P9 U7.P12 U7.P14 U7.P16 U7.P17 U7.P18 U7.P19 U7.R5 U7.R6 U7.R7 U7.R9 U7.R10 U7.R11 U7.R12 U7.R14 U7.R15 U7.R16 U7.R17 U7.R22 U7.T7 U7.T9 U7.T10 U7.T12 U7.T13 U7.T14 U7.T15 U7.T17 U7.T20 U7.T22 U7.U1 U7.U2 U7.U6 U7.U7 U7.U8 U7.U10 U7.U11 U7.U12 U7.U13 U7.U15 U7.U16 U7.U17 U7.U20 U7.U22 U7.V6 U7.V9 U7.V10 U7.V11 U7.V13 U7.V14 U7.V15 U7.V16 U7.V18 U7.V19 U7.V20 U7.W2 U7.W8 U7.W9 U7.W19 U7.Y3 U7.Y6 U7.Y9 U7.Y10 U7.Y11 U7.Y14 U7.Y15 U7.Y16 U7.Y17 U7.Y19 U7.Y20 U8.4 U8.5 U8.6 U8.11 U8.12 U8.13 U8.14 U9.10 U9.11 U10.8 U11.8 U12.8 U13.6 U13.15 U13.16 U13.17 U17.4 U19.1

## Keep-outs
Keep-Out Layer:
  lines w0: 1862.2,500 1862.2,2862.2 ; 2362.2,0 0,0 0,2362.2 2362.2,2362.2

## Silkscreen, mask and mechanical layers (free items; w line width, h text height)
Dimension:
  lines w0: 1862.2,500 1862.2,2862.2 ; 2362.2,0 0,0 0,2362.2 2362.2,2362.2